# Altium PCB morpheus_pill_bqle_ASSY.PcbDoc (part 1 of 2)
Units mil, origin at the board's own origin, x right, y up, seen from the top; angles counter-clockwise.
Board outline 944.59 x 944.86 mil, 4 copper layers (TOP, COM, SIG, BOT), stack 33.6 mil thick; 116 components, 86 nets, 384 pads, 167 vias.
Unrouted connection lines stored in the file: 4.
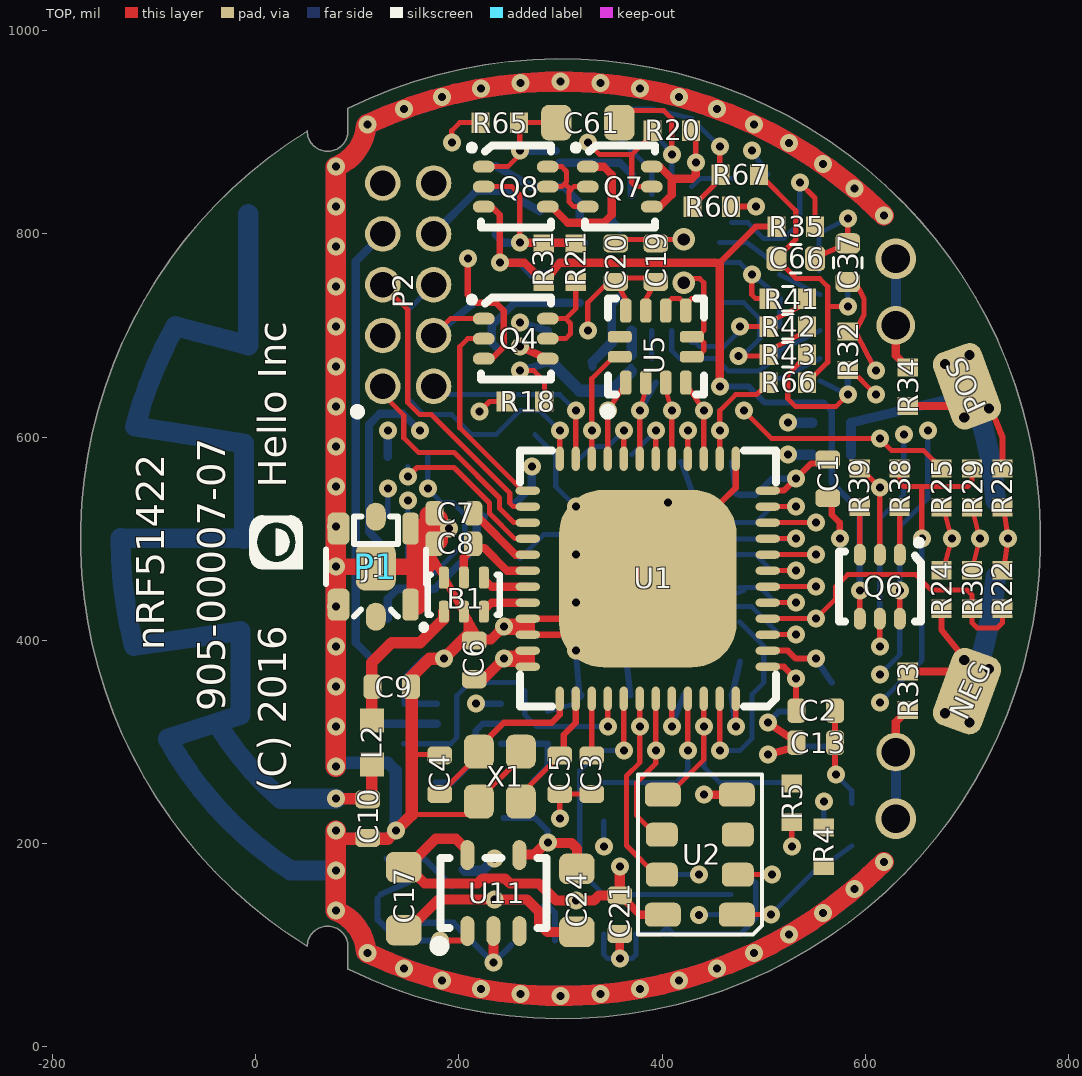
[diagram p0: TOP view]
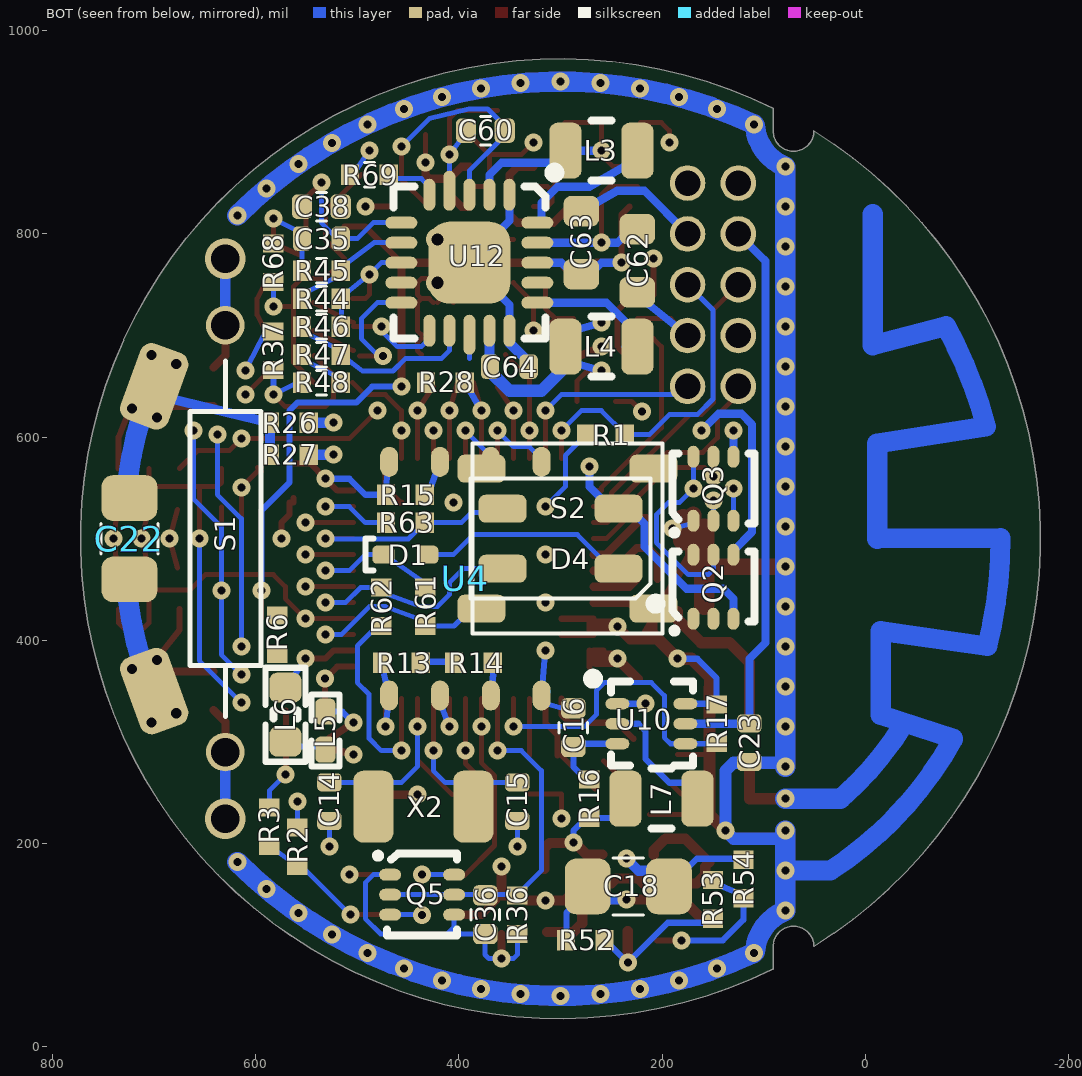
[diagram p1: BOT view, seen from below]
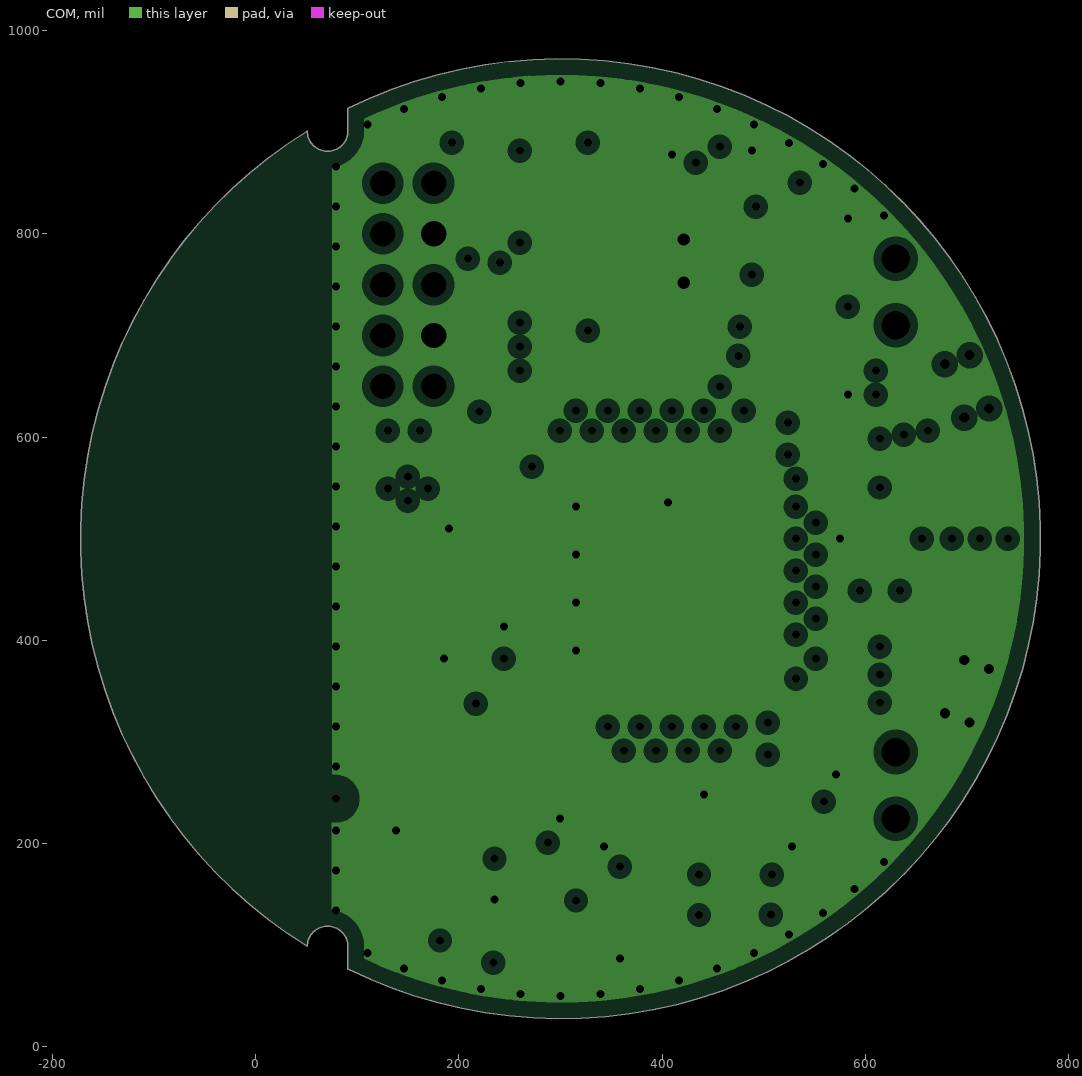
[diagram p2: COM, clearances drawn from the general rule]
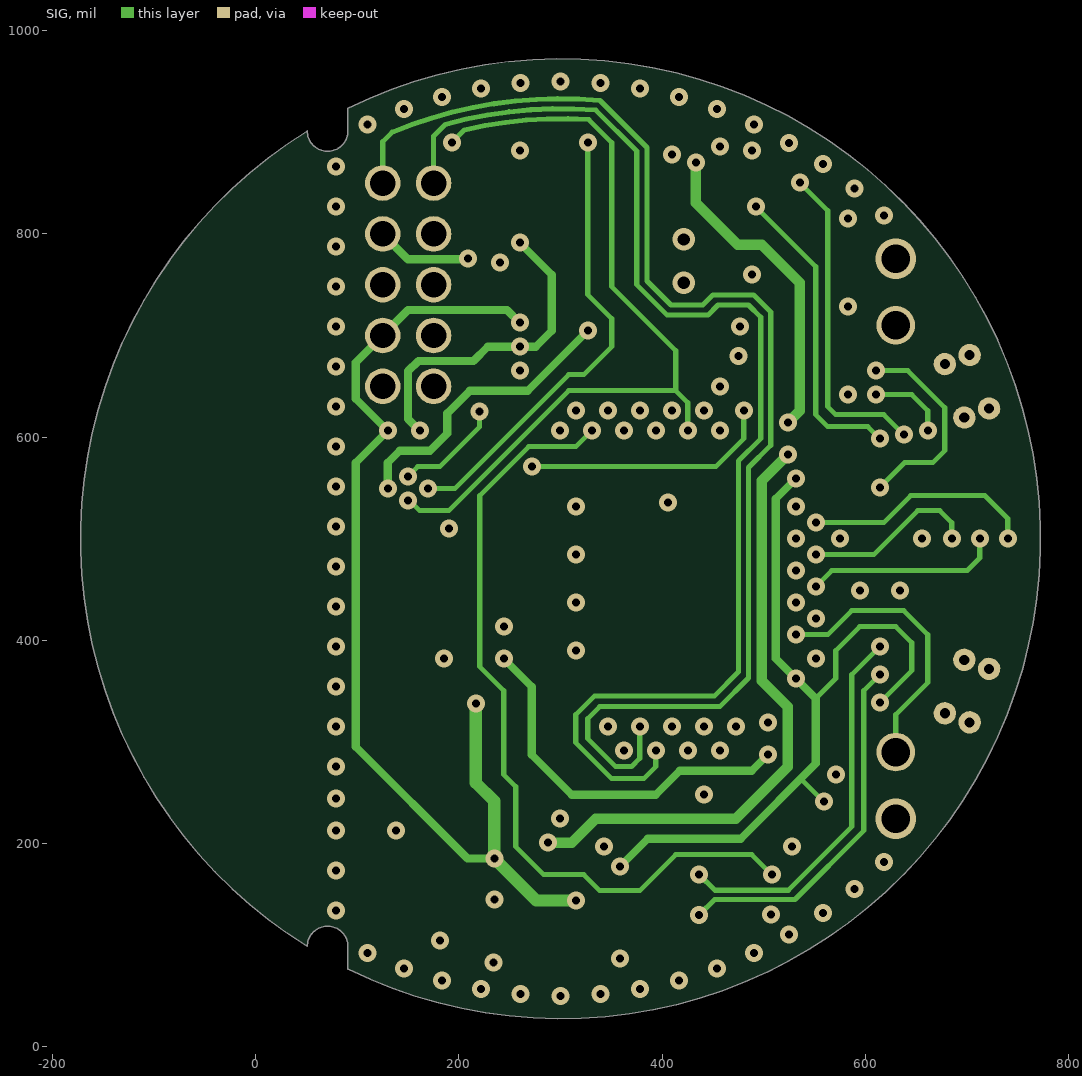
[diagram p3: SIG]

## Layer stack, top to bottom
TOP: signal copper 1.4
Dielectric: prepreg 8, FR-4, Dk 4.8
COM: plane copper 1.4, net GND
Dielectric: core 12, FR-4, Dk 4.8
SIG: signal copper 1.4
Dielectric: prepreg 8, FR-4, Dk 4.8
BOT: signal copper 1.4

## Board outline
50.71,98.68 cw(c300,500) 50.71,901.32 ccw(c70.71,901.32) 90.71,901.32 90.71,923.81 90.81,923.61 cw(c300,500) 91.23,76.19 90.71,76.19 90.71,98.68 ccw(c70.71,98.68)

## Design rules (kind name [scope] priority, off if disabled: settings)
Clearance "Gnd Polygon" [OnLayer('GND')] p1: gap=2.99
Clearance [All] p2: gap=2.95
ComponentClearance [All] p1: gap=5 collisioncheckmode=3 verticalgap=5 showdistances=FALSE
FabricationTestPointUsage TestPointUsage [All] p1: valid=0 allowmultiple=FALSE
FabricationTestpoint Testpoint [All] p1: side=3 testpointundercomponent=TRUE minsize=40 maxsize=100 preferedsize=60 minholesize=0 maxholesize=40 preferedholesize=32 testpointgrid=1 allowsidetop=TRUE allowsidebottom=TRUE usegrid=TRUE gridtolerance=0.01
HoleSize [All] p1: absolutevalues=TRUE maxlimit=250 minlimit=3 maxpercent=80.000 minpercent=20.000
MinimumAnnularRing [All] p1: minimumring=2
PasteMaskExpansion [All] p1: expansion=-1
PlaneClearance [All] p1: clearance=8
PlaneConnect [All] p1: planeconnectstyle=Relief reliefexpansion=5 reliefentries=4 reliefconductorwidth=5 reliefairgap=5
PolygonConnect [All] p1: connectstyle=Direct reliefconductorwidth=15 reliefentries=4 polygonreliefangle="45 Angle"
RoutingLayers [All] p1: top layer_v5=TRUE mid layer 2_v5=FALSE bottom layer_v5=TRUE
RoutingVias [All] p1: holewidth=12 width=22 viastyle="Through Hole" minholewidth=3 minwidth=8 maxholewidth=65 maxwidth=100
SilkscreenOverComponentPads [IsPad] p1: minsilkscreentomaskgap=10
SolderMaskExpansion [All] p1: expansion=1.97
Width [All] p1: maxlimit=200 minlimit=3 preferedwidth=10 toplayer_maxwidth=100 midlayer2_maxwidth=100 minimp=50.000000 maximp=50.000000 favimp=50.000000
19 further rules are at their usual default settings.

## Classes and differential pairs
component class Power: C16 C17 C18 C22 C23 C24 C35 C36 C37 C38 C60 C61 C62 C63 C64 C66 D1 D4 L3 L4 L7 NEG POS Q2 Q3 Q4 Q5 Q6 Q7 Q8 R16 R17 R20 R21 R26 R27 R31 R32 R33 R34 R35 R36 R37 R38 R39 R41 R42 R43 R44 R45 R46 R47 R48 R52 R53 R54 R60 R61 R62 R63 R65 R66 R67 R68 R69 S1 S2 U10 U11 U12
component class Motion: C19 C20 R18 R28 U5
component class Morpheus_pill_bqle: C9 C10 J1 L2 P1 R13 R14 R15 R22 R23 R24 R25 R29 R30 U4
component class Bluetooth: B1 C1 C2 C3 C4 C5 C6 C7 C8 C13 C14 C15 C21 L5 L6 P2 R1 R2 R3 R4 R5 R6 U1 U2 X1 X2

## Components (designator, comment, footprint, x,y, rotation, side; value= is the part's Value field where it differs from the comment)
B1 "2450BM14E0003" DFN50P160X80X70-6N 204.72,444.88 r90 top locked
C1 "0.1u" CAP0402_SENSE_DVT 562.99,559.06 r90 top
C2 "0.1u" CAP0402_SENSE_DVT 551.18,330.71 r180 top
C3 "0.1u" CAP0402_SENSE_DVT 330.71,267.72 r90 top
C4 "12p" CAP0402_SENSE_DVT 181.1,267.72 r270 top
C5 "12p" CAP0402_SENSE_DVT 299.21,267.72 r90 top
C6 "1000p" CAP0402_SENSE_DVT 215,380.75 r270 top
C7 "C_0.047u_10_16_X5R_0201" CAP0402_SENSE_DVT 195,525 r0 top
C8 "2200p" CAP0402_SENSE_DVT 195,495 r0 top
C9 "DNP" CAP0402_SENSE_DVT 133.86,354.33 r0 top
C10 "" CAP0402_SENSE_DVT 110.24,224.41 r270 top
C13 "1u" CAP0402_SENSE_DVT 551.18,299.21 r180 top
C14 "12p" CAP0402_SENSE_DVT 527.56,241.14 r90 bottom
C15 "12p" CAP0402_SENSE_DVT 342.52,241.14 r90 bottom
C16 "1000p" 0402C20X24 287.4,313.98 r270 bottom (schematic designator C61)
C17 "4.7u" CAP0603_SENSE_DVT 145.67,145.67 r90 top
C18 "47u" 0805C45X55 233.39,157.8 r180 bottom locked
C19 "0.1u" CAP0402_SENSE_DVT 393.7,771.65 r270 top (schematic designator C61)
C20 "0.1u" CAP0402_SENSE_DVT 354.33,771.65 r270 top (schematic designator C61)
C21 "0.1u" CAP0402_SENSE_DVT 358.27,129.92 r90 top
C22 "47u" 0805C45X55 724.41,500 r90 bottom locked
C23 "1u" CAP0402_SENSE_DVT 114.17,299.21 r90 bottom (schematic designator C61)
C24 "4.7u" CAP0603_SENSE_DVT 316.06,144.02 r90 top
C35 "0.1u" CAP0402_SENSE_DVT 535.43,795.28 r180 bottom (schematic designator C61)
C36 "1000p" 0402C20X24 374.02,129.92 r90 bottom (schematic designator C61)
C37 "1000p" 0402C20X24 582.68,771.65 r270 top (schematic designator C61)
C38 "1000p" 0402C20X24 535.43,826.77 r180 bottom (schematic designator C61)
C60 "1000p" 0402C20X24 374.02,901.57 r180 bottom (schematic designator C19)
C61 "1u" CAP0603_SENSE_DVT 326.77,909.45 r180 top
C62 "1u" CAP0603_SENSE_DVT 224.41,773.62 r90 bottom locked (schematic designator C61)
C63 "1u" CAP0603_SENSE_DVT 279.53,791.34 r270 bottom locked (schematic designator C61)
C64 "1u" CAP0402_SENSE_DVT 350.39,669.29 r0 bottom (schematic designator C61)
C66 "1000p" 0402C20X24 531.5,775.59 r180 top
D1 "1N4148XTPM" SOD523 452.76,484.25 r180 bottom
D4 "CLV1A-FKB" PLCC150X290P280X320X190-4 300,500 r180 bottom locked
J1 "MM8130-2600" COAXIAL-SWF 118.11,472.44 r180 top locked
L2 "" IND_0402 114.17,299.21 r270 top
L3 "22u" IND_0805 259.84,881.89 r0 bottom
L4 "10u" IND_0805 259.84,688.98 r180 bottom locked
L5 "15nH" INDC1005X04L 531.5,311.02 r270 bottom
L6 "10µH" INDC1608X06L 570.87,326.77 r90 bottom locked (schematic designator L4)
L7 "2.2u" IND_0805 200.79,244.09 r0 bottom locked
NEG "" TP80x50CP 700,350 r340 top locked (schematic designator VP)
P1 "Contact Spring" TP120X70SC 122.05,476.38 r90 top
P2 "DNP" HDR1.27-2X5-N 150,750 r90 top locked
POS "" TP80x50CP 700,650 r20 top locked (schematic designator VP)
Q2 "DMC2400UV-7" SOT-563 149.61,452.76 r90 bottom locked
Q3 "DMC2400UV-7" SOT-563 149.61,549.21 r90 bottom locked
Q4 "DMC2400UV-7" SOT-563 255.91,696.85 r0 top locked
Q5 "DMG6301UDW-7" SOT-563 436.34,149.61 r180 bottom locked
Q6 "DMC2400UV-7" SOT-563 614.17,452.76 r270 top locked
Q7 "NTJD4152PT1G" SOT-563 358.27,846.46 r0 top locked
Q8 "DMC2400UV-7" SOT-563 255.91,846.46 r0 top locked
R1 "511" RES0402_SENSE_DVT 255.91,602.36 r180 bottom
R2 "100k" RES0402_SENSE_DVT 559.06,196.85 r90 bottom
R3 "100k" RES0402_SENSE_DVT 586.61,216.54 r270 bottom
R4 "100k" RES0402_SENSE_DVT 559.06,196.85 r90 top
R5 "100k" RES0402_SENSE_DVT 527.56,240.16 r90 top
R6 "100k" RES0402_SENSE_DVT 578.74,405.51 r270 bottom (schematic designator R5)
R13 "DNP" RES0402_SENSE_DVT 456.69,377.95 r180 bottom (schematic designator R20)
R14 "DNP" RES0402_SENSE_DVT 385.83,377.95 r0 bottom
R15 "DNP" RES0402_SENSE_DVT 452.76,543.31 r0 bottom (schematic designator R16)
R16 "511" RES0402_SENSE_DVT 271.65,244.09 r270 bottom
R17 "1.3M" RES0402_SENSE_DVT 146.34,317.87 r90 bottom (schematic designator R16)
R18 "1.3M" RES0402_SENSE_DVT 265,635 r0 top
R20 "1.3M" RES0402_SENSE_DVT 409.45,901.57 r0 top
R21 "1.3M" RES0402_SENSE_DVT 314.96,771.65 r90 top
R22 "215K" RES0402_SENSE_DVT 735,450 r90 top
R23 "523k" RES0402_SENSE_DVT 735,550 r90 top
R24 "215K" RES0402_SENSE_DVT 675,450 r90 top
R25 "523k" RES0402_SENSE_DVT 675,550 r90 top
R26 "10" RES0402_SENSE_DVT 566.93,614.17 r180 bottom (schematic designator R27)
R27 "10" RES0402_SENSE_DVT 566.93,582.68 r180 bottom
R28 "523k" RES0402_SENSE_DVT 413.39,653.54 r0 bottom
R29 "523k" RES0402_SENSE_DVT 705,550 r90 top
R30 "523k" RES0402_SENSE_DVT 705,450 r90 top
R31 "10" RES0402_SENSE_DVT 283.46,771.65 r90 top
R32 "1.3M" RES0402_SENSE_DVT 582.68,685.04 r90 top (schematic designator R11)
R33 "1.3M" RES0402_SENSE_DVT 641.73,350.39 r270 top
R34 "1.3M" RES0402_SENSE_DVT 641.73,649.61 r270 top
R35 "100k" RES0402_SENSE_DVT 531.5,807.09 r180 top (schematic designator R11)
R36 "1.3M" RES0402_SENSE_DVT 342.52,129.92 r90 bottom
R37 "1.3M" RES0402_SENSE_DVT 582.68,685.04 r90 bottom
R38 "10" RES0402_SENSE_DVT 633.58,550.2 r90 top (schematic designator R36)
R39 "1.3M" RES0402_SENSE_DVT 594.49,550.2 r270 top (schematic designator R11)
R41 "887K" 0402R18X20 523.62,736.22 r180 top
R42 "6.80M" 0402R18X20 523.62,708.66 r180 top
R43 "5.60M" 0402R18X20 523.62,681.1 r180 top
R44 "7.50M" 0402R18X20 535.43,736.22 r180 bottom
R45 "5.60M" 0402R18X20 535.43,763.78 r180 bottom
R46 "4.22M" 0402R18X20 535.43,708.66 r180 bottom
R47 "7.50M" 0402R18X20 535.43,681.1 r180 bottom
R48 "1.3M" 0402R18X20 535.43,653.54 r180 bottom
R52 "10" RES0402_SENSE_DVT 275.71,104.65 r180 bottom
R53 "953k" RES0402_SENSE_DVT 150,145 r90 bottom
R54 "" RES0402_SENSE_DVT 120,165 r90 bottom
R60 "499k" RES0402_SENSE_DVT 448.82,826.77 r0 top
R61 "511" RES0402_SENSE_DVT 433.07,433.07 r90 bottom
R62 "511" RES0402_SENSE_DVT 476.38,433.07 r90 bottom
R63 "511" RES0402_SENSE_DVT 452.76,515.75 r180 bottom
R65 "100k" RES0402_SENSE_DVT 240.16,909.45 r180 top
R66 "100k" RES0402_SENSE_DVT 523.62,653.54 r0 top
R67 "100k" RES0402_SENSE_DVT 476.38,858.27 r180 top
R68 "100k" RES0402_SENSE_DVT 582.68,771.65 r270 bottom
R69 "1.3M" 0402R18X20 488.19,858.27 r180 bottom
S1 "REED_SPST_NO" REED-10x1.8 629.92,500 r270 bottom locked
S2 "REED_SPST_NO" PLCC350X400P450X450X65-4 293.31,500 r180 bottom locked
U1 "nRF51422-QFAA" VQFN40P600X600X100-48 385.83,460.63 r180 top locked
U2 "KR3225Y" 8-CLCC-KYOCERO 437.01,188.98 r90 top locked
U4 "DNP" DFN127P600x500x80-8E 393.7,460.63 r90 bottom locked
U5 "ST LIS2DH12" DFN50P200X200X80-12N 393.7,688.98 r90 top locked
U10 "TPS61098" DFN50P150X150X80-6N 210,317.87 r180 bottom locked
U11 "TPS79718" SOT65P212X110-5N 233.86,151.26 r90 top locked
U12 "BQ25570RGR" VQFN50P350X350X100-20 389.76,771.65 r270 bottom locked
X1 "ILCX19" ILCX19 204.72,307.09 r270 top
X2 "FC-135 32.7680KA-AC3" Epson_FC-135 435.04,236.22 r180 bottom locked

## Footprints (in the part's own frame and the unit in brackets; to place one, negate y for a bottom-side part, rotate by r counter-clockwise, add the part's x,y. Pads: shape width x height; smd on the part's side, far side on the other; paste and mask are expansions set on the pad)
8-CLCC-KYOCERO [mm] "8 lead CLCC package, 2.5 x 3.2mm"
  rrect50% 0.6x0.9 smd: 1(-1.5,-0.925) 4(1.5,-0.925) 5(1.5,0.925) 8(-1.5,0.925)
  rrect50% 0.6x0.8 smd: 2(-0.5,-0.95) 3(0.5,-0.95) 6(0.5,0.95) 7(-0.5,0.95)
  silkscreen extent -2,-1.55 2,1.55, body extent -1.6,-1.25 1.6,1.25, height 0.8
0402C20X24 [mil] "Chip Capacitor 0402 38p20x24"
  rrect50% 20x24 smd: 1(-19,0) 2(19,0)
  silkscreen extent -5,-14 5,14, body extent -20,-12 20,12, height 20
0402R18X20 [mil] "Chip Resistor 0402 38p18x20"
  rect 18x20 smd: 1(-19,0) 2(19,0)
  silkscreen extent -5,-12 5,12, body extent -20,-10 20,10, height 20
0805C45X55 [mil] "Chip Capacitor 0805 80p45x55"
  rrect50% 45x55 smd: 1(-40,0) 2(40,0)
  silkscreen extent -15,-28 15,28, body extent -40,-25 40,25, height 20
CAP0402_SENSE_DVT [mil] "Chip Capacitor, 2-Leads"
  rrect50% 18x24 smd: 1(-19,0) 2(19,0)
  body extent -21,-11 21,11, height 22
CAP0603_SENSE_DVT [mil] "Chip Capacitor, 2-Leads"
  rrect50% 30x35 smd: 1(-31,0) 2(31,0)
  body extent -31,-16 32,16, height 31
COAXIAL-SWF [mm]
  oval 0.5x0.7 smd: 1(0,1.25) 3(0,-1.25)
  rrect50% 0.4x0.8 smd: 2(-0.87,0.95) 2(-0.87,-0.95)
  rrect50% 0.55x0.8 smd: 2(0.93,0.95) 2(0.93,-0.95)
  TOP pour cut-out: 0.65,-0.55 -0.65,-0.55 -0.65,-1.35 0.65,-1.35
  TOP pour cut-out: -0.65,0.55 0.65,0.55 0.65,1.35 -0.65,1.35
  silkscreen extent -1.25,-1.25 1.25,1.25
DFN50P150X150X80-6N [mm] "DFN, 6-Leads, Body 1.5x1.5mm (max), Pitch 0.50mm, IPC Medium Density"
  oval 0.6x0.28 smd: 1(-0.866,0.5) 2(-0.866,0) 3(-0.866,-0.5) 4(0.834,-0.5) 5(0.834,0) 6(0.834,0.5)
  silkscreen extent -1.6,-1.05 1.02,1.25, body extent -0.79,-0.87 0.84,0.77, height 0.8
DFN50P160X80X70-6N [mm] "DFN, 6-Leads, body 1.6x0.8mm (max), Pitch 0.50mm"
  rrect50% 0.55x0.25 smd: 1(-0.425,0.5) 2(-0.425,0) 3(-0.425,-0.5) 4(0.425,-0.5) 5(0.425,0) 6(0.425,0.5)
  silkscreen extent -0.83,-0.9 0.5,1, body extent -0.41,-0.8 0.41,0.8, height 0.62
DFN50P200X200X80-12N [mm] "DFN, 12-Leads, Body 2.0x2.0mm (max), Pitch 0.50mm, IPC Medium Density"
  rrect50% 0.6x0.28 smd: 1(-0.9,0.75) 2(-0.9,0.25) 3(-0.9,-0.25) 4(-0.9,-0.75) 7(0.9,-0.75) 8(0.9,-0.25) 9(0.9,0.25) 10(0.9,0.75)
  rrect50% 0.28x0.6 smd: 5(-0.25,-0.9) 6(0.25,-0.9) 11(0.25,0.9) 12(-0.25,0.9)
  silkscreen extent -1.72,-1.2 1.2,1.3, body extent -1,-1 1,1, height 0.8
DFN127P600x500x80-8E [mm] "WSON 8L 6.0x5.0x0.8mm"
  oval 0.75x0.45 smd mask+0.051: 1(-2.921,1.905) 2(-2.921,0.635) 3(-2.921,-0.635) 4(-2.921,-1.905) 5(2.921,-1.905) 6(2.921,-0.635) 7(2.921,0.635) 8(2.921,1.905)
Epson_FC-135 [mm] "Epson Crystal FC-135 series"
  rrect50% 1x1.8 smd: 1(-1.25,0) 2(1.25,0)
  body extent -1.6,-0.75 1.6,0.75, height 1.1
HDR1.27-2X5-N [mil] "CONNECTOR, PCB, 2X5, 1.27MM, VERT, TH"
  round 35 hole 25 paste-39.37: 1(-100,25) 2(-100,-25) 3(-50,25) 4(-50,-25) 5(0,25) 6(0,-25) 7(50,25) 8(50,-25) 9(100,25) 10(100,-25)
  silkscreen extent -128,47 -122,53
ILCX19 [mm] "ILSI ILCX19 Crystal Oscillator 2.0 x 1.6 x 0.45mm"
  rrect50% 0.85x0.75 smd: 1(0.425,0.375) 2(1.675,0.375) 3(1.675,1.425) 4(0.425,1.425)
  body extent 0.05,0.1 2.05,1.7, height 0.45
IND_0402 [mm] "Chip Inductor, 2-Leads, Body 1.00x0.50mm, IPC Medium Density"
  rect 0.6x0.6 smd mask+0.05: 1(-0.55,0) 2(0.55,0)
  body extent -0.52,-0.28 0.53,0.27, height 0.55
IND_0805 [mm] "Chip Inductor, 2-Leads, Body 1.60x0.80mm, IPC Medium Density"
  rrect50% 0.8x1.4 smd: 1(-0.9,0) 2(0.9,0)
  silkscreen extent -0.25,-0.75 0.25,0.75, body extent -1.01,-0.65 1,0.65, height 0.8
INDC1005X04L [mm] "Chip Inductor, 2-Leads, Body 1.0x0.5mm, IPC High Density"
  rrect50% 0.65x0.5 smd: 1(-0.475,0) 2(0.475,0)
  silkscreen extent -0.9,-0.35 0.9,0.35, body extent -0.5,-0.3 0.5,0.3, height 0.5
INDC1608X06L [mm] "Chip Inductor, 2-Leads, Body 1.6x0.8mm, IPC High Density"
  rrect50% 0.75x0.8 smd: 1(-0.675,0) 2(0.675,0)
  silkscreen extent -1.17,-0.5 1.17,0.5, body extent -0.8,-0.48 0.8,0.47, height 0.8
PLCC150X290P280X320X190-4 [mm] "PLCC, 4-Leads, body 0.280x0.320mm (max), Pitch 1.50x2.90mm,  Height 1.90mm"
  rrect50% 1.2x0.7 smd: 1(1.45,-0.75) 2(1.45,0.75) 3(-1.45,0.75) 4(-1.45,-0.75)
  silkscreen extent -2.25,-1.75 2.5,1.5, body extent -1.6,-1.4 1.6,1.4, height 2
PLCC350X400P450X450X65-4 [mm] "PLCC, 4-Leads, body 4.5x4.5mm (max), Pitch 3.5x4.0mm,  Height 0.65mm"
  rrect50% 1.2x0.7 smd: 1(-2.15,1.75) 2(2.15,1.75) 3(-2.15,-1.75) 4(2.15,-1.75)
  silkscreen extent -2.37,-2.37 2.37,2.37, body extent -2.25,-2.25 2.25,2.25, height 2
REED-10x1.8 [mil]
  round 38 hole 28 paste-39.37: 1(-210,0) 2(210,0)
  silkscreen extent -175,-35 175,35
RES0402_SENSE_DVT [mil] "Chip resistor 0402"
  rect 18x20 smd: 1(-19,0) 2(19,0)
  body extent -24,-8 24,8, height 20
SOD523 [mm] "Diode small package"
  rrect50% 0.55x0.45 smd: 1(-0.55,0) 2(0.55,0)
  silkscreen extent -1,-0.4 -0.8,0.4, body extent -0.6,-0.4 0.6,0.4, height 0.65
SOT65P212X110-5N [mm] "SOT23, 5-Leads, Body 2.3x2.3mm (max), Pitch 0.65mm, IPC Medium Density"
  oval 0.75x0.35 smd: 1(-0.95,0.65) 2(-0.95,0) 3(-0.95,-0.65) 4(0.95,-0.65) 5(0.95,0.65)
  silkscreen extent -1.45,-1.33 0.88,1.47, body extent -0.67,-1.12 0.67,1.13, height 1.1
SOT-563 [mm] "SOT563, 6-Leads, Body 1.2x1.6mm (max), Pitch 0.50mm, IPC Medium Density"
  oval 0.55x0.3 smd mask+0.075: 1(-0.8,0.5) 2(-0.8,0) 3(-0.8,-0.5) 4(0.8,-0.5) 5(0.8,0) 6(0.8,0.5)
  silkscreen extent -1.17,-1.02 0.87,1.05, body extent -0.6,-0.8 0.6,0.8, height 1.1
TP80x50CP [mil] "Test Pad 0.80x0.50mils"
  round 22 hole 10 paste-39.37 mask-2: 1(-13,-28) 1(-13,28) 1(13,-28) 1(13,28)
  rrect50% 50x80 smd paste-6 mask-1.97: 1(0,0)
  rrect50% 50x80 smd far side paste-6 mask-2: 1(0,0)
TP120X70SC [mm] "Test Pad 120x70 mils (for spring contact)"
  rrect50% 1.2x1 smd paste-0.7 mask-0.1: 1(-0.1,0.1)
VQFN40P600X600X100-48 [mil]
  rrect50% 175x175 smd: 0(0,0)
  oval 24x8 smd: 1(-118.11,86.61) 2(-118.11,70.87) 3(-118.11,55.12) 4(-118.11,39.37) 5(-118.11,23.62) 6(-118.11,7.87) 7(-118.11,-7.87) 8(-118.11,-23.62) 9(-118.11,-39.37) 10(-118.11,-55.12) 11(-118.11,-70.87) 12(-118.11,-86.61) 25(118.11,-86.61) 26(118.11,-70.87) 27(118.11,-55.12) 28(118.11,-39.37) 29(118.11,-23.62) 30(118.11,-7.87) 31(118.11,7.87) 32(118.11,23.62) 33(118.11,39.37) 34(118.11,55.12) 35(118.11,70.87) 36(118.11,86.61)
  oval 8x24 smd: 13(-86.61,-118.11) 14(-70.87,-118.11) 15(-55.12,-118.11) 16(-39.37,-118.11) 17(-23.62,-118.11) 18(-7.87,-118.11) 19(7.87,-118.11) 20(23.62,-118.11) 21(39.37,-118.11) 22(55.12,-118.11) 23(70.87,-118.11) 24(86.61,-118.11) 37(86.61,118.11) 38(70.87,118.11) 39(55.12,118.11) 40(39.37,118.11) 41(23.62,118.11) 42(7.87,118.11) 43(-7.87,118.11) 44(-23.62,118.11) 45(-39.37,118.11) 46(-55.12,118.11) 47(-70.87,118.11) 48(-86.61,118.11)
  silkscreen extent -126,-126 126,126
VQFN50P350X350X100-20 [mm] "VQFN, 20-Leads, Body 3.5x3.5mm (max), Pitch 0.5mm, IPC Medium Density"
  rrect50% 2.05x2.05 smd paste-0.3: 0(0,0)
  oval 0.8x0.3 smd: 1(-1.7,1) 2(-1.7,0.5) 3(-1.7,0) 5(-1.7,-1) 11(1.7,-1) 12(1.7,-0.5) 14(1.7,0.5) 15(1.7,1)
  oval 1x0.3 smd: 4(-1.8,-0.5) 13(1.8,0)
  oval 0.3x0.8 smd: 6(-1,-1.7) 7(-0.5,-1.7) 8(0,-1.7) 9(0.5,-1.7) 10(1,-1.7) 16(1,1.7) 17(0.5,1.7) 18(0,1.7) 19(-0.5,1.7) 20(-1,1.7)
  silkscreen extent -2.37,-1.9 1.9,2.25, body extent -1.75,-1.75 1.75,1.75, height 1

## Part data
B1: "2.45 GHz Impedance Matched Balun-Filter"
C1 C2 C3 C19 C20 C21 C35: library part C_0.1u_10_50_X7R_0402, "Chip capacitor"
C4 C5 C14 C15: library part C_12p_5_50_C0G_0402, "Chip capacitor"
C6: library part C_1000p_10_25_X7R_0201, "Chip capacitor"
C7: "Chip capacitor"
C8: library part C_2200p_5_16_X7R_0201, "Chip capacitor"
C9: library part C_2.2p_5_50_NPO_0402, "Chip capacitor"
C10: library part C_0.4p_5_50_NPO_0402, "Chip capacitor"
C13 C23 C61 C62 C63 C64: library part C_1u_10_6.3_X5R_0402, "Chip capacitor"
C16 C36 C37 C38 C60 C66: library part C_1000p_10_50_X7R_0402, "Chip capacitor"
C17 C24: library part C_4.7u_20_10_X5R_0603, "Chip capacitor"
C18 C22: library part C_47u_20_10_X5R_0805, "Chip capacitor"
D1: "Silicon diode, 30V 200mA"
D4: "RGB LED Array"
J1: "Coaxial Connector with Switch"
L2: library part L_5.6n_0.1_?_270_300_?, "SMD RF inductor 2.2nH"
L3: library part L_22u_0805, "SMD power inductor, 22uH"
L4: library part L_10u_0805, "SMD power inductor, 10uH"
L5: library part L0402-15n, "Inductor, 320mA, ±5%"
L6: library part L0603-10µ, "Inductor, 80mA, ±10%"
L7: library part L_2.2u_0805, "SMD power inductor, 2.2uH"
NEG POS: library part 5016, "Single-pad test point"
P1: library part TP-120X70-SC, "Test Pad 120x70 mil ( contact spring )"
P2: library part CON10A
Q2 Q3 Q4 Q6 Q8: "Dual PN-Channel MOSFET 1.2v drive 20V 0.88A"
Q7: "Dual P-Channel MOSFET 1.2v drive 20V 0.88A"
R1 R16 R61 R62 R63: library part R_511_1_0.1_0402, "Chip Resistor"
R2 R3 R4 R5 R6 R35 R65 R66 R67 R68: library part R_100k_1_0.1_0402, "Chip Resistor"
R13 R14 R15 R23 R25 R28 R29 R30: library part R_523k_1_0.1_0402, "Chip Resistor"
R17 R18 R20 R21 R32 R33 R34 R36 R37 R39 R48 R69: library part R_1.3M_5_0.1_0402, "Chip Resistor"
R22 R24: library part R_215K_1_0.1_0402, "Chip Resistor"
R26 R27 R31 R38 R52: library part R_10_1_0.1_0402, "Chip Resistor"
R41: library part R_887k_1_0.1_0402, "Chip Resistor"
R42: library part R_6.80M_1_0.1_0402, "Chip Resistor"
R43 R45: library part R_5.60M_1_0.1_0402, "Chip Resistor"
R44 R47: library part R_7.50M_1_0.1_0402, "Chip Resistor"
R46: library part R_4.22M_1_0.1_0402, "Chip Resistor"
R53: library part R_953k_1_0.1_0402, "Chip Resistor"
R54: library part R_549k_1_0.1_0402, "Chip Resistor"
R60: library part R_499k_1_0.1_0402, "Chip Resistor"
S1: library part SW_REED_SPST_NO, "SWITCH REED SPST NO"
S2: library part SW_SPST_NO, "SWITCH SPST NO"
U1: library part nRF51422_QFAA, "Multi-protocol Bluetooth Low Energy, ANT and 2.4GHz proprietary system-on-chip"
U2: library part KR3225Y32768DGR, "Kyocero I2C RTC w/ Crystal"
U4: library part FM25VN10-G, "Cypress SPI FRAM 128Kx8"
U5: library part LIS2DH12, "STU Accelerometer"
U10: "Boost Converter"
U11: library part TPS79718DCK, "LDO 1.8V SC70-5"
X1: "ILSI ILCX19 Crystal Oscillator"
X2: library part "Espon_FC-135 32.7680KA-AC3", "Epson 32kHz crystal, 9pF"

## Via types
v1: diameter 17.72, hole 7.87, TOP to BOT, 158 vias
v2: diameter 17.72, hole 7.87, TOP to BOT, tented both sides, 5 vias
v3: diameter 22, hole 12, TOP to BOT, 2 vias
v4: diameter 40, hole 28, TOP to BOT, 2 vias

## Nets (pads, with @x,y where several pads share a name; then routed paths per layer and width w, separated by ;. In a path a pad name is that pad's centre, name@x,y a point inside that pad or via, vN(x,y) a via of type N, cw(c..) or ccw(c..) an arc to the next point about the centre after c; other vN are vias at no path point)
AIN0: C15.2 U1.45 X2.2 | length 158.4
  TOP w5: v1(425.2,291.34) U1.45@425.2,342.52
  BOT w5: C15.2@342.52,259.84 413.39,259.84 425.2,271.65 v1(425.2,291.34)
AIN1: C14.2 U1.46 U2.5 X2.1 | length 241.3
  TOP w5: U2.5@406.5,248.03 440.94,282.48 v1(440.94,314.96) U1.46@440.94,342.52
  BOT w5: v1(440.94,314.96) 440.94,275.59 456.69,259.84 C14.2@527.56,259.84
AIN2: D4.4 R62.2 U1.5 | length 237.5
  TOP w5: U1.5@503.74,437.01 v1(531.5,437.01)
  BOT w5: D4.4@357.09,470.47 395.67,470.47 409.45,456.69 409.45,444.88 421.26,433.07 437.01,433.07 R62.2@480.32,448.82 ; R62.2@476.38,452.07 496.75,452.07 511.81,437.01 v1(531.5,437.01)
AIN3: R29.1 R30.2 U1.6 | length 304.2
  TOP w5: U1.6@503.74,452.76 v1(551.18,452.76) ; R30.2@704.72,468.5 v1(712.6,500) R29.1@704.72,531.5
  SIG w5: v1(551.18,452.76) 566.93,468.5 700.51,468.5 ; 700.51,469 712.6,481.09 v1(712.6,500)
AIN4: D1.1 R61.2 U1.7 | length 135.3
  TOP w5: U1.7@503.74,468.5 v1(531.5,468.5)
  BOT w5: R61.2@433.07,456.01 D1.1@472.44,483.57 ; D1.1@474.41,484.25 492.13,484.25 507.87,468.5 v1@527.36,468.5
AIN5: R24.2 R25.1 U1.8 | length 279.8
  TOP w5: U1.8@503.74,484.25 v1(551.18,484.25) ; R24.2@677.17,471.07 v1(685.04,500) R25.1@677.17,528.93
  SIG w5: v1(551.18,484.25) 608.27,484.25 651.57,527.56 673.23,527.56 685.04,515.75 v1(685.04,500)
AIN6: D4.3 R63.2 U1.9 | length 212.8
  TOP w5: U1.9@503.74,500 v1(531.5,500)
  BOT w5: D4.3@357.09,525.59 387.8,525.59 397.64,515.75 R63.2@433.76,515.75 449.63,499.87 v1@531.5,499.87
AIN7: R22.2 R23.1 U1.10 | length 335.1
  TOP w5: U1.10@503.74,515.75 v1(551.18,515.75) ; R22.2@736.22,471.07 v1(740.16,500) R23.1@736.22,528.93
  SIG w5: v1(551.18,515.75) 618.11,515.75 644.68,542.32 717.83,542.32 740.16,520 v1(740.16,500)
ANT: C10.1 L2.2 | length 1445.5
  TOP w10.98: v1(78.74,244.09) 114.17,244.09 L2.2@114.17,277.56
  BOT w19.68: -119.98,394.34 cw(c300,500) -133.07,500.72 -13.07,500.1 ; -119.89,394.24 -15,409.21 ; -86.4,303.43 -15,326.42 ; -86.35,302.48 ccw(c236.46,483.29) 34.22,173.46 ; -38.19,318.36 ccw(c235,485) 24.22,244.22 ; -11.54,593.59 -118.73,610.52 cw(c300,500) -79.24,709.11 -7.39,690.41 ; 34.87,173.23 78.74,173.23
  BOT w20: -15,326.42 -15,409.21 ; -11.54,500.1 -11.54,593.59 ; -7.39,690.41 -7.39,819.46 ; 24.61,244.12 v1(78.74,244.09)
ANT1: B1.4 U1.31 | length 46.4
  TOP w7.99: 232.28,452.76 U1.31@267.52,452.76
  TOP w8: B1.4@224.41,460.63 232.28,452.76
ANT2: B1.3 U1.32 | length 46.4
  TOP w7.99: 232.28,437.01 U1.32@267.52,437.01
  TOP w8: B1.3@224.41,429.13 232.28,437.01
AUX_EN: Q4.2 U1.25 | length 204.9
  TOP w5: Q4.2@228.35,696.85 208.66,696.85 200.79,688.98 200.79,609.21 259.84,550.16 259.84,547.24 U1.25@267.72,547.24
BLE_OUT: B1.1 C9.1 J1.1 J1.3 L2.1 | length 152.6
  TOP w11: L2.1@115,321.65 114.17,322.48 114.17,377.95 133.86,397.64 161.89,397.64 185.04,420.79 B1.1@185.04,428.15
BOOT: C36.2 Q5.2 Q5.5 R36.2 U1.41 | length 359.8
  TOP w5: v1(362.2,291.34) U1.41@362.2,342.52
  BOT w5: v1(362.2,291.34) 338.58,291.34 318.9,271.65 318.9,173.23 342.52,149.61 Q5.5@404.84,149.61 Q5.2@467.83,149.61
CND: R52.2 R53.1 U11.2 | length 152.2
  TOP w10: v1(233.86,82.68) U11.2@233.86,113.86
  BOT w6: R53.1@154.29,123.35 155.59,122.05 194.49,122.05 v1(233.86,82.68) R52.2@251.26,100.08
DCC: L6.2 U1.2 | length 79.1
  TOP w5.98: U1.2@503.74,389.76 523.62,389.76 531.5,381.89 v1(551.18,381.89)
  BOT w5.98: v1(551.18,381.89) L6.2@566.93,358.27
DEC1: C3.2 U1.39 | length 55.8
  TOP w5: C3.2@330.71,286.72 U1.39@330.71,342.52
DEC2: C7.2 U1.29 | length 67.1
  TOP w7.99: C7.2@215.38,520.37 219.63,520.37 255.75,484.25 U1.29@267.52,484.25
DISABLE: R69.2 U12.5 | length 43.3
  BOT w5: U12.5@429.13,846.46 437.01,854.33 R69.2@469.19,854.33
DISCHARGE: Q5.3 Q6.6 R32.1 | length 793.3
  TOP w5: R32.1@584.3,667.67 v1(610.24,641.73) ; Q6.6@633.86,421.26 v1(633.86,448.82)
  SIG w5: v1(436.34,129.61) 451.73,145 530.83,145 598.43,212.6 598.43,350.39 v1(614.17,366.14) ; v1(610.24,641.73) 645.67,641.73 661.42,625.98 v1@661.42,602.36
  BOT w5: v1@436.34,129.92 Q5.3@467.83,129.92 ; v1(614.17,366.14) 633.86,385.83 633.86,511.81 661.42,539.37 v1(661.42,606.3)
DRV: R41.2 R44.2 R46.2 U12.8 | length 142.5
  TOP w5: v1(488.19,759.84) 488.19,740.16 492.13,736.22 R41.2@504.62,736.22
  BOT w5: U12.8@452.76,771.65 476.38,771.65 v1(488.19,759.84) R44.2@512.61,740.3 ; R44.2@512.5,740.16 R44.2@516.43,736.22 ; R46.2@515.75,708.66 R44.2@515.75,736.22
ENABLE: C35.2 Q5.6 Q6.5 R35.1 U12.6 | length 1142
  TOP w5: v1(535.43,850.39) 550.5,835.33 R35.1@550.5,803.15 ; v1(614.17,393.7) Q6.5@614.17,421.26
  SIG w5: v1(436.34,169.61) 451.95,154 524.08,154 586.61,216.54 586.61,366.14 v1(614.17,393.7) ; v1@531.5,854.33 562.99,822.83 562.99,629.92 570.87,622.05 618.11,622.05 v1(637.8,602.36)
  BOT w5: Q5.6@404.84,169.29 v1@436.34,169.29 ; U12.6@468.5,811.02 484.25,811.02 500,795.28 C35.2@516.43,795.28 ; C35.2@519.69,795.28 535.43,811.02 v1(535.43,850.39) ; v1(614.17,393.7) 614.17,519.68 637.8,543.31 v1(637.8,602.36)
FB: R53.2 R54.1 U11.1 | length 138.1
  TOP w6: v1@186.14,104.65 U11.1@204.84,104.65
  BOT w6: R54.1@120,146 120,125 140.35,104.65 v1@180.87,104.65 ; R54.1@123,150 R53.2@149.65,161.65
  other v1: 181.22,104.65
FLASH_MISO: U1.44 U4.2 | length 61.2
  TOP w5: v1(409.45,314.96) U1.44@409.45,342.52
  BOT w6: v1(409.45,314.96) U4.2@421.26,346.46
FLASH_MOSI: U1.20 U4.5 | length 82.3
  TOP w5: U1.20@362.2,578.74 v1(362.2,606.3)
  BOT w5: U4.5@318.9,578.74 330.71,590.55 346.46,590.55 v1(362.2,606.3)
FLASH_RST: R15.1 U4.7 | length 34.3
  BOT w6: U4.7@418.7,575.63 R15.1@430.51,543.45
FLASH_SCLK: U1.18 U4.6 | length 61
  TOP w5: U1.18@393.7,578.74 v1(393.7,606.3)
  BOT w5: U4.6@370.08,582.68 v1(393.7,606.3)
FLASH_WPT: R14.1 U4.3 | length 33.5
  BOT w6: R14.1@364.76,378.9 U4.3@368.7,345.63
GND: B1.2 B1.6 C1.1 C2.1 C3.1 C4.1 C5.1 C6.1 C7.1 C8.1 C9.2 C10.2 C13.1 C14.1 C15.1 C16.1 C17.1 C18.1 C19.1 C20.1 C21.1 C22.1 C23.1 C24.1 C35.1 C36.1 C37.1 C60.1 C61.1 C62.1 C63.1 C64.1 C66.1 J1.2 NEG.1 P1.1 P2.4 P2.8 Q3.1 Q4.1 Q5.1 Q5.4 R1.1 R3.1 R5.1 R17.2 R24.1 R33.1 R36.1 R37.1 R43.1 R45.1 R48.1 R52.1 R69.1 U1.0 U1.13 U1.33 U1.34 U2.4 U4.4 U5.5 U5.6 U5.7 U5.8 U10.6 U12.0 U12.1 U12.4 U12.15 X1.2 X1.4 | length 7274.8
  TOP w5: 153.54,287.4 C4.1@185.04,287.4 ; 157.88,228.35 X1.2@212.6,228.35 ; P2.4@175,700 191.54,716.54 Q4.1@224.41,716.54 ; X1.2@224.41,248.03 X1.4@257.53,281.15 ; v1(299.21,224.41) C5.1@299.21,248.72 C3.1@330.71,248.72 ; C20.1@346.46,794.59 v3(421.26,794.59) ; C61.1@362.2,921.26 401.57,921.26 409.45,913.39 v1(409.45,877.95) ; U5.8@405.51,732.28 409.45,736.22 417.32,736.22 U5.7@421.26,732.28 ; U5.7@425.2,732.28 429.13,736.22 437.01,736.22 ; v3@429.13,755.91 437.01,755.91 440.94,751.97 440.94,740.16 437.01,736.22 ; U5.5@437.01,681.1 440.94,685.04 440.94,692.91 U5.6@437.01,696.85 ; U5.6@437.01,700.79 440.94,704.72 440.94,732.28 437.01,736.22 ; v1(527.56,196.85) R5.1@527.56,221.16 ; R43.1@542.62,680.42 523.62,661.42 523.62,637.8 531.5,629.92 570.87,629.92 v1(582.68,641.73) ; C66.1@555.12,778.84 C37.1@582.68,790.65 ; C37.1@582.68,786.72 v1@582.68,814.28
  TOP w5.98: C1.1@562.99,535.43 C1.1@562.99,540.06 ; C1.1@566.93,535.43 566.93,523.62 574.8,515.75 v1@574.8,503.94 ; v1@570.18,267.72 C2.1@570.18,330.71
  TOP w6: U1.34@267.52,405.51 299.02,405.51 ; U1.33@267.52,421.26 U1.0@299.02,421.26 ; U1.34@271.65,405.51 U1.33@271.65,421.26 ; U1.0@456.81,535.63 457.87,535.63 472.24,550 ; 472.44,550 U1.13@472.44,578.74 ; R24.1@675,431 675,410 NEG.1@695,385
  TOP w7.99: C6.1@208.66,400.75 B1.2@208.66,421.1 ; v1(358.27,86.61) C21.1@358.27,110.92 ; v1(440.94,248.03) U2.4@473.43,248.03 ; R33.1@641.73,369.39 NEG.1@688.98,369.39
  TOP w8.07: 166.22,495.69 C6.1@217.38,405.72
  TOP w10: C17.1@161.54,126.3 180.24,145 266.85,145 278.66,133.19 278.66,121.38 287.02,113.02 C24.1@313.11,113.02 ; C6.1@208.66,400.75 231.46,400.75 v1(244.09,413.39)
  TOP w12: v1@78.74,204.72 129.92,204.72 153.54,228.35 153.54,353.65 C9.2@152.86,354.33 152.86,363.69 171.06,381.89 v1(185.04,381.89) C6.1@210.01,406.86
  TOP w16: v1(78.74,472.44) 153.54,472.44 ; 169.29,473.62 C7.1@169.29,523.62 ; v1(244.09,413.39) 264.76,413.39
  TOP w20: v1(78.74,212.6) v1(78.74,133.86) cw(c61.73,90.04) v1@108.61,93.45 ; v1(78.74,275.59) v1(78.74,866.14) ccw(c61.73,909.96) v1@108.61,906.55 ; v1(109.82,92.16) ccw(c300,500) v1(618.2,181.8) ; v1(109.82,907.84) cw(c300,500) v1(618.2,818.2) ; J1.2@158.46,435.04 J1.2@158.46,509.84 ; C8.1@179.13,498.44 C7.1@179.13,519.28
  BOT w5: Q3.1@170.28,514.76 v2(189.96,509.84) ; R1.1@274.91,602.36 295.28,581.99 295.28,551.18 v1(314.96,531.5) ; C16.1@287.4,330.02 U4.4@314.96,337.9 ; R36.1@342.52,110.92 342.52,90.55 346.46,86.61 v1(358.27,86.61) ; v1(342.52,196.85) C15.1@342.52,222.14 ; v1@358.58,86.61 370.39,86.61 374.33,90.55 C36.1@374.33,110.92 ; C36.1@374.02,110.92 C36.1@374.33,110.92 ; C60.1@393.02,894.39 C60.1@393.02,901.57 ; C60.1@396.95,894.39 v1(409.45,877.95) U12.4@409.45,838.58 ; Q5.4@404.84,129.92 404.84,117.44 ; Q5.1@467.83,169.29 484.25,169.29 492.13,161.42 492.13,125.98 477.06,110.92 411.36,110.92 404.84,117.44 ; v1(488.19,881.89) R69.1@503.94,858.27 ; v1(527.56,196.85) C14.1@527.56,222.14 ; R45.1@554.43,763.78 C35.1@554.43,795.28 ; R48.1@555.36,655.39 v1(582.68,641.73) ; C35.1@559.06,803.15 v1(582.68,814.96) ; v1(570.87,267.72) 586.61,251.97 R3.1@586.61,239.47 ; C36.1@374.33,110.92 398.32,110.92 404.84,117.44
  BOT w5.98: v1(582.68,641.73) R37.1@582.68,666.04
  BOT w6: U10.6@178.5,337.56 146.34,337.56 146.34,362.87 165.35,381.89 v1(185.04,381.89) ; C18.1@283.23,138.11 288.15,138.11 294.35,131.91 R52.1@294.35,104.65 ; v1@314.76,392.87 U4.4@318.7,345.63
  BOT w7.99: C64.1@331.39,669.29 C64.1@331.39,673.91 ; U12.15@350.39,692.91 U12.15@350.39,704.72
  BOT w8: P2.4@175,700 C62.1@214.37,731.5 ; P2.8@175,800 217.52,842.52 244.09,842.52 C63.1@279.53,822.34 ; U12.15@350.39,704.72 350.39,730.31 U12.0@358.27,738.19 ; U12.1@350.39,838.58 350.39,812.99 U12.0@358.27,805.12
  BOT w10: v1@235.35,145 C18.1@265.87,145 ; U4.4@314.96,349.37 U4.4@318.7,345.63 ; C64.1@331.39,673.91 U12.15@350.39,692.91
  BOT w12: v1@78.74,204.72 129.92,204.72 v1(137.8,212.6) 137.8,271.65 129.92,279.53 v1@78.74,279.53
  BOT w20: v1@78.77,212.6 v1(78.74,133.86) cw(c61.73,90.04) v1@108.61,93.45 ; v1(78.74,275.59) v1(78.74,866.14) ccw(c61.73,909.96) v1@108.61,906.55 ; v1(109.82,92.16) ccw(c300,500) v1(618.2,181.8) ; v1(109.82,907.84) cw(c300,500) v1(618.2,818.2) ; NEG.1@704.07,352.93 ccw(c300,500) C22.1@728.36,462.52
  other v1: 300,50 260.78,51.71 339.22,51.71 221.86,56.84 378.14,56.84 183.53,65.33 416.47,65.33 146.09,77.14 453.91,77.14 490.18,92.16 525,110.29 558.11,131.38 235,145 589.25,155.28 78.74,173.23 78.74,314.96 78.74,354.33 314.96,389.76 78.74,393.7 78.74,433.07 314.96,437.01 314.96,484.25 574.8,500 78.74,511.81 405.51,535.43 78.74,551.18 78.74,590.55 78.74,629.92 78.74,669.29 78.74,708.66 78.74,748.03 78.74,787.4 78.74,826.77 589.25,844.72 558.11,868.62 525,889.71 490.18,907.84 146.09,922.86 453.91,922.86 183.53,934.67 416.47,934.67 221.86,943.16 378.14,943.16 260.78,948.29 339.22,948.29 300,950
  other v3: 421.26,751.97
HYST: R42.1 R43.2 U12.10 | length 154.8
  TOP w5: v1(475,680) R43.2@497.94,680 ; R43.2@503.94,685.04 R42.1@543.31,704.72
  BOT w5: U12.10@456.69,732.28 480.32,732.28 496.06,716.54 496.06,696.85 v1@480.32,681.1